# Altium PCB PCB.PcbDoc
Units mm, origin at the board's own origin, x right, y up, seen from the top; angles counter-clockwise.
Board outline 50 x 36 mm, 2 copper layers (Top Layer, Bottom Layer), stack 1.57 mm thick; 23 components, 10 nets, 42 pads, 153 vias.
Unrouted connection lines stored in the file: 2.
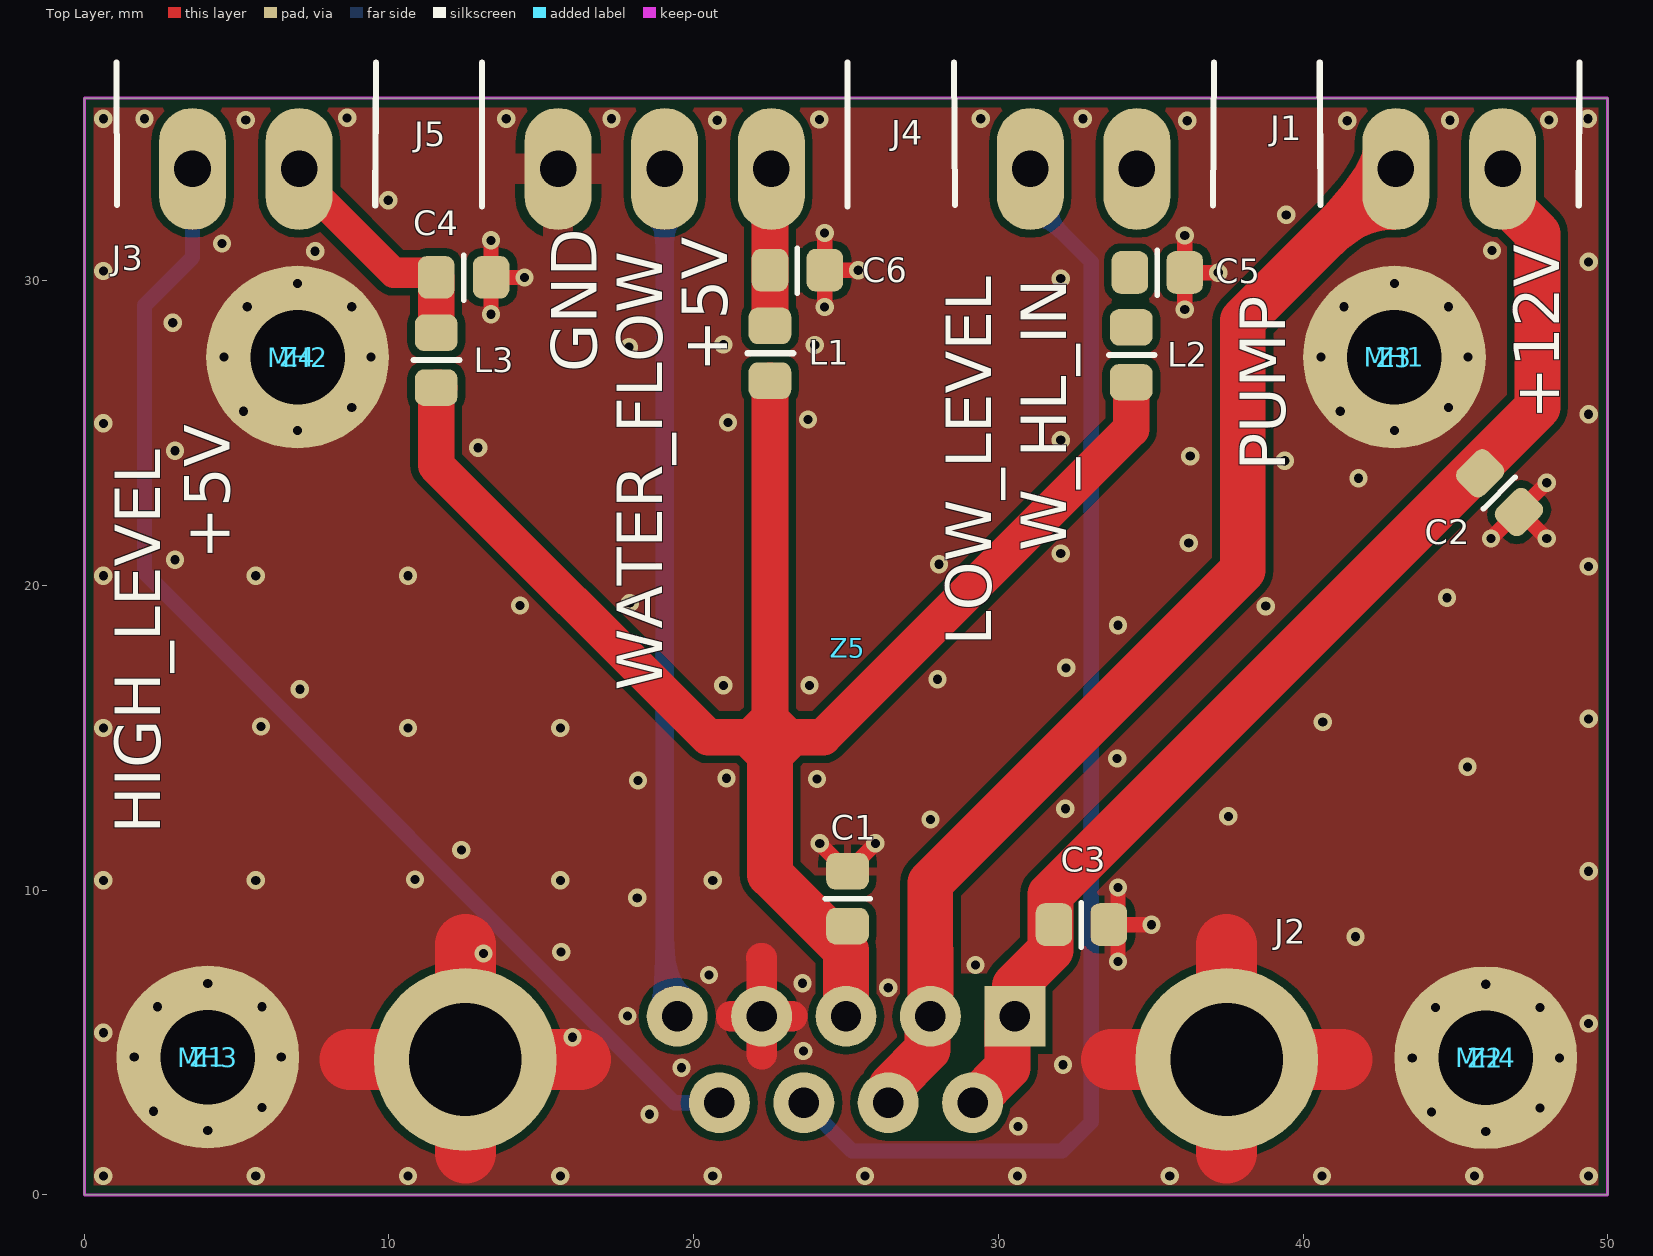
[diagram p0: Top Layer view]
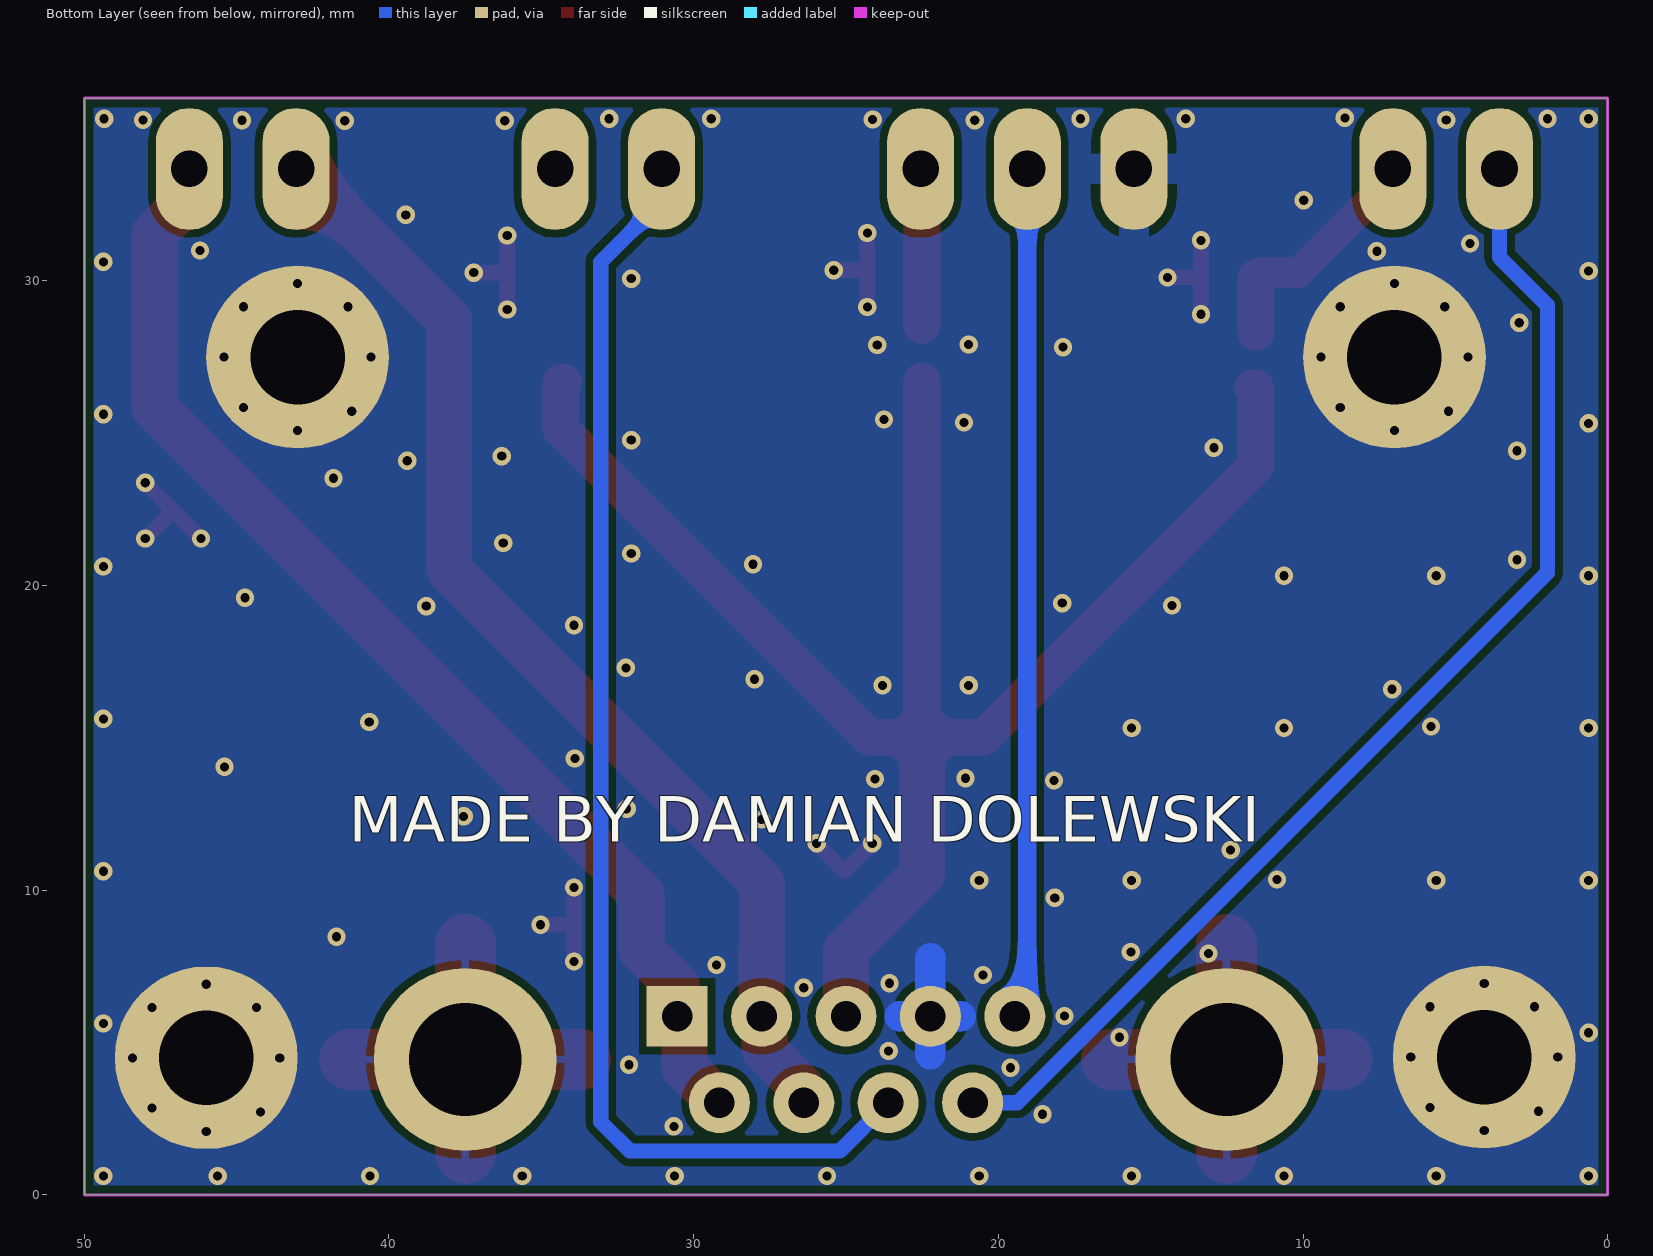
[diagram p1: Bottom Layer view, seen from below]

## Layer stack, top to bottom
Top Solder: solder mask 0.01, Solder Resist, Dk 3.5
Top Layer: signal copper 0.035
Dielectric 1: dielectric 1.5, FR-4, Dk 4.8
Bottom Layer: signal copper 0.035
Bottom Solder: solder mask 0.01, Solder Resist, Dk 3.5

## Board outline
0,0 50,0 50,36 0,36

## Design rules (kind name [scope] priority, off if disabled: settings)
Clearance [All] p1: gap=0.254 ignorepadtopadclearanceinfootprint=FALSE except(0: Arc-Hole Track-Hole SMDPad-Hole THPad-Hole Via-Hole Fill-Hole Poly-Hole Region-Hole Text-Hole)
ComponentClearance [InComponent('Radiator1')] p1: gap=0 collisioncheckmode=3 verticalgap=0 showdistances=FALSE
Height [All] p1: minheight=0 maxheight=40 prefheight=12.7
HoleSize [All] p1: absolutevalues=TRUE maxlimit=5 minlimit=0.025 maxpercent=80.000 minpercent=20.000
PolygonConnect PolygonConnect_3pin [HasFootprint('284512-3')] p1: connectstyle=Relief reliefconductorwidth=1 reliefentries=4 polygonreliefangle="90 Angle" airgapwidth=0.3
PolygonConnect PolygonConnect_MH [HasFootprint('MH_M3')] p2: connectstyle=Direct reliefconductorwidth=0.254 reliefentries=4 polygonreliefangle="90 Angle" airgapwidth=0.254
PolygonConnect PolygonConnect_Via [IsVia] p3: connectstyle=Direct reliefconductorwidth=0.254 reliefentries=4 polygonreliefangle="90 Angle" airgapwidth=0.254
PolygonConnect [All] p4: connectstyle=Relief reliefconductorwidth=0.254 reliefentries=4 polygonreliefangle="90 Angle" airgapwidth=0.254
RoomDefinition boxer_spliter [InComponentClass('boxer_spliter')] p1: confinementstyle=ConfineIn formatcopy=TRUE lockcomponents=FALSE outline -51.649,-37.525 308.534,-37.525 308.534,222.952 -51.649,222.952
RoutingVias [All] p1: holewidth=0.711 width=1.27 viastyle="Through Hole" minholewidth=0.711 minwidth=1.27 maxholewidth=0.711 maxwidth=1.27
SilkToSilkClearance [All] p1: silktosilkclearance=0.1
SilkToSolderMaskClearance [IsPad] p1: minsilkscreentomaskgap=0.2 clearancetoexposedcopper=TRUE
SolderMaskExpansion [All] p1: expansion=0.102
Width [All] p1: maxlimit=10 minlimit=0.3 preferedwidth=0.5 minimp=50.000000 maximp=50.000000 favimp=50.000000
25 further rules are at their usual default settings.

## Components (designator, comment, footprint, x,y, rotation, side; value= is the part's Value field where it differs from the comment)
C1 "Capacitor" C_0805 25.05,9.725 r90 top value=100n
C2 "Capacitor" C_0805 46.45,23.05 r315 top value=100n
C3 "Capacitor" C_0805 32.726,8.875 r0 top value=100n
C4 "Capacitor" C_0805 12.45,30.119 r0 top value=100n
C5 "Capacitor" C_0805 35.218,30.277 r0 top value=100n
C6 "Capacitor" C_0805 23.405,30.352 r0 top value=100n
J1 "284512-2" 284512-2 44.8,33.675 r0 top
J2 "DS1037-09FNAKT74" DB9 25,4.445 r180 top
J3 "284512-2" 284512-2 5.3,33.675 r0 top
J4 "284512-2" 284512-2 32.8,33.675 r0 top
J5 "284512-3" 284512-3 19.05,33.675 r0 top
L1 "742792031" L_0805 22.505,27.625 r270 top value=300@100M
L2 "742792031" L_0805 34.362,27.575 r270 top value=300@100M
L3 "742792031" L_0805 11.55,27.4 r270 top value=300@100M
MH1 "Mounting hole" MH_M3 43,27.5 r0 top
MH2 "Mounting hole" MH_M3 7,27.5 r0 top
MH3 "Mounting hole" MH_M3 4.05,4.525 r0 top
MH4 "Mounting hole" MH_M3 46,4.5 r0 top
Z1 "Hexagonal M3 5mm spacer" SPACER_M3_5mm 4.05,4.525 r0 top
Z2 "Hexagonal M3 5mm spacer" SPACER_M3_5mm 46,4.5 r0 top
Z3 "Hexagonal M3 5mm spacer" SPACER_M3_5mm 43,27.5 r0 top
Z4 "Hexagonal M3 5mm spacer" SPACER_M3_5mm 7,27.5 r0 top
Z5 "Supertronic PP94E" PP94E 25.05,17.95 r180 top locked

## Footprints (in the part's own frame and the unit in brackets; to place one, negate y for a bottom-side part, rotate by r counter-clockwise, add the part's x,y. Pads: shape width x height; smd on the part's side, far side on the other; paste and mask are expansions set on the pad)
284512-2 [mm] "Terminal Block 3.5mm 2-pin ,11A, 300V"
  oval 2.2x4 hole 1.2: 1(-1.75,0) 2(1.75,0)
  silkscreen extent -4.25,-1.2 4.28,3.5, body extent -4.5,-1.2 4.5,8, height 7.25
284512-3 [mm] "Terminal Block 3.5mm 3-pin ,11A, 300V"
  oval 2.2x4 hole 1.2: 1(-3.5,0) 2(0,0) 3(3.5,0)
  silkscreen extent -6,-1.22 6,3.5, body extent -6.25,-1.2 6.25,8, height 7.25
C_0805 [mm] "Chip Capacitor, Body 2.0x1.3mm, IPC High Density"
  rrect50% 1.2x1.4 smd: 1(-0.9,0) 2(0.9,0)
  silkscreen extent 0,-0.75 0,0.72, body extent -1.01,-0.62 0.99,0.63, height 0.8
DB9 [mm]
  rect 2x2 hole 1: 1(-5.54,-1.42)
  round 2 hole 1: 2(-2.77,-1.42) 3(0,-1.42) 4(2.77,-1.42) 5(5.54,-1.42) 6(-4.155,1.42) 7(-1.385,1.42) 8(1.385,1.42) 9(4.155,1.42)
  round 6 hole 3.7: 10(-12.495,0) 11(12.495,0)
  body extent -15.19,-2.18 15.31,14.52, height 12.45
L_0805 [mm] "Chip Inductor Body 2.0x1.2mm, IPC Medium Density"
  rrect50% 1.2x1.4 smd: 1(-0.9,0) 2(0.9,0)
  silkscreen extent 0,-0.74 0,0.76, body extent -1.01,-0.63 0.99,0.57, height 0.95
MH_M3 [mm] "M3 3mm hole"
  round 6 hole 3.1: MH(0,0)
PP94E [mm]
  body extent -42.75,-24.15 42.75,24.15, height 17.4
SPACER_M3_5mm [mm]
  body extent -2.89,-2.5 2.89,2.5, height 6.4

## Part data
J1 J3 J4: library part "Header 2", "Header, 2-Pin"
J2: library part DB9, "Receptacle Assembly, 9 Position, Right Angle"
J5: library part "Header 3", "Header, 3-Pin"
L1 L2 L3: library part FB, "Ferrite Bead"
MH1 MH2 MH3 MH4: "Mounting hole 2.3mm"
Z1 Z2 Z3 Z4: library part SPACER_M3_5mm
Z5: library part PP94E

## Via types
v1: diameter 0.6, hole 0.3, Top Layer to Bottom Layer, tented both sides, 153 vias

## Nets (pads, with @x,y where several pads share a name; then routed paths per layer and width w, separated by ;. In a path a pad name is that pad's centre, name@x,y a point inside that pad or via, vN(x,y) a via of type N, cw(c..) or ccw(c..) an arc to the next point about the centre after c; other vN are vias at no path point)
+5V: C1.1 J2.3 L1.2 L2.2 L3.2 | length 57
  Top Layer w1.2: L3.2@11.65,26.5 L3.2 11.55,23.95 20.475,15.025 22.45,15.025 ; L1.2 22.505,15.08 ; L2.2@34.262,26.675 L2.2 34.362,25.137 24.25,15.025 22.505,15.025 ; 22.45,15.025 22.505,15.025 ; 22.45,15.025 22.505,15.08 ; 22.505,15.025 22.505,15.08
  Top Layer w1.5: 22.505,15.025 22.505,10.52 25,8.025 J2.3
+5V_HL: C4.1 J3.2 L3.1 | length 8.2
  Top Layer w1: J3.2 7.05,33.1 7.604,32.545 7.88,32.545 10.155,30.27 11.45,30.27 11.55,30.17 C4.1
  Top Layer w1.2: L3.1 11.55,30.019 C4.1
+5V_LL: C5.1 J4.2 L2.1
+5V_WF: C6.1 J5.3 L1.1 | length 5.2
  Top Layer w1.2: L1.1 C6.1 22.505,33.631 J5.3
+12V: C2.1 C3.1 J1.2 J2.1 J2.6 | length 38.8
  Top Layer w1.5: J2.6 30.3,4.17 30.3,5.625 J2.1 30.54,6.865 31.715,8.04 31.715,9.865 47.7,25.85 47.7,31.546 46.55,32.697 J1.2
GND: C1.2 C2.2 C3.2 C4.2 C5.2 C6.2 J2.4 J2.10 J2.11 J5.1 MH1.MH MH2.MH MH3.MH MH4.MH | length 59.8
  Top Layer w0.5: v1(13.35,28.907) C4.2 ; v1(13.35,31.331) C4.2 ; v1(14.45,30.114) 13.355,30.114 C4.2 ; v1(24.136,11.539) C1.2 v1(25.964,11.539) ; v1(24.3,29.145) C6.2@24.3,30.357 ; v1(24.3,31.57) C6.2@24.3,30.357 ; v1(25.4,30.352) C6.2 C6.2@24.3,30.357 ; v1(33.925,7.663) C3.2@33.925,8.875 ; v1(33.925,10.087) C3.2@33.925,8.875 ; v1(35.025,8.87) 33.93,8.87 C3.2@33.925,8.875 ; v1(36.118,29.065) C5.2 ; v1(36.118,31.489) C5.2 ; v1(37.218,30.272) 36.123,30.272 C5.2 ; v1(46.173,21.548) C2.2@47.086,22.461 ; C2.2 C2.2@47.086,22.461 ; v1(48,21.548) C2.2@47.086,22.461 ; v1(48,23.375) C2.2@47.086,22.461
  Top Layer w1: 21.225,5.865 J2.4 ; 22.225,7.775 22.23,7.77 J2.4 ; 22.23,4.617 J2.4 ; 23.235,5.865 J2.4
  Top Layer w2: 8.725,4.445 J2.11 ; 12.505,1.375 J2.11 ; 12.505,8.225 J2.11 ; 16.285,4.445 J2.11 ; 33.715,4.445 J2.10 ; 37.495,1.375 J2.10 ; 37.495,8.225 J2.10 ; 41.275,4.445 J2.10
  Bottom Layer w1: 21.225,5.865 J2.4 ; 22.225,7.775 22.23,7.77 J2.4 ; 22.23,4.617 J2.4 ; 23.235,5.865 J2.4
  other v1: 0.625,0.625 5.625,0.625 10.625,0.625 15.625,0.625 20.625,0.625 25.625,0.625 30.625,0.625 35.625,0.625 40.625,0.625 45.625,0.625 49.375,0.625 46,2.087 4.05,2.112 30.65,2.25 18.55,2.65 44.222,2.722 2.272,2.747 47.778,2.849 5.828,2.874 19.6,4.175 32.125,4.275 43.587,4.5 48.413,4.5 1.637,4.525 6.463,4.525 23.6,4.725 16.025,5.175 0.625,5.325 49.375,5.625 17.825,5.875 44.349,6.151 47.778,6.151 2.399,6.176 5.828,6.176 26.385,6.8 46,6.913 4.05,6.938 23.575,6.95 20.5,7.221 29.25,7.549 13.1,7.925 15.65,7.975 41.725,8.475 18.15,9.75 0.625,10.325 5.625,10.325 15.625,10.325 20.625,10.325 10.85,10.35 49.375,10.625 12.375,11.325 27.775,12.325 37.55,12.425 32.2,12.675 18.175,13.6 24.05,13.65 21.075,13.675 45.4,14.05 33.9,14.325 0.625,15.325 10.625,15.325 15.625,15.325 5.8,15.375 40.65,15.525 49.375,15.625 7.075,16.6 20.975,16.725 23.8,16.725 28,16.925 32.225,17.3 33.925,18.7 38.775,19.325 14.3,19.35 17.9,19.425 44.725,19.6 0.625,20.325 5.625,20.325 10.625,20.325 49.375,20.625 28.05,20.7 2.975,20.85 32.05,21.05 36.25,21.4 41.825,23.525 39.4,24.1 36.3,24.25 2.975,24.425 12.925,24.525 32.05,24.775 7,25.087 43,25.087 0.625,25.325 21.125,25.35 23.75,25.45 49.375,25.625 5.222,25.722 41.222,25.722 8.778,25.849 44.778,25.849 4.587,27.5 9.413,27.5 40.587,27.5 45.413,27.5 17.875,27.827 20.975,27.913 23.975,27.9 2.9,28.625 5.349,29.151 8.778,29.151 41.349,29.151 44.778,29.151 7,29.913 43,29.913 32.05,30.075 0.625,30.325 49.375,30.625 7.575,30.973 46.2,31 4.516,31.225 39.45,32.168 9.975,32.65 36.2,35.258 41.45,35.258 5.3,35.281 20.775,35.275 44.825,35.275 48.075,35.281 24.125,35.3 0.625,35.325 1.975,35.325 13.85,35.325 17.3,35.325 29.425,35.325 32.775,35.325 49.35,35.325 8.625,35.352
PUMP_OUT: J1.1 J2.2 J2.7 | length 37.8
  Top Layer w1.5: J2.7 26.481,3.121 26.481,3.567 27.674,4.761 27.674,5.769 J2.2 27.77,10.245 38.025,20.5 38.025,28.703 42.328,33.006 42.727,33.006 43.05,33.33 J1.1
W_HL_IN: J2.9 J3.1 | length 40
  Bottom Layer w0.5: J3.1 3.55,30.775 1.975,29.2 1.975,20.425 19.375,3.025 J2.9
W_LL_IN: J2.8 J4.1 | length 42.6
  Bottom Layer w0.5: J2.8 25.194,1.446 32.096,1.446 33.05,2.4 33.05,30.625 31.05,32.625 J4.1
WF_IN: J2.5 J5.2 | length 28
  Bottom Layer w0.6: J5.2 19.05,6.654 19.46,6.244 J2.5

## Polygon pours and split planes (outlines as drawn)
GND on Bottom Layer "BOTTOM_GND" (solid, remove dead copper, pour order 4): 0,36 50,36 50,0 0,0
no net on Bottom Layer "BOTTOM_GND" (solid, pour order 2): 102.05,10.402
GND on Top Layer "TOP_GND" (solid, remove dead copper, pour order 6): 0,36 50,36 50,0 0,0

## Keep-outs
Keep-Out Layer:
  the board outline again, w0.1

## Other copper
Top Layer:
  region net +5V: 23.562,14.488 22.499,13.426 21.413,14.512
  region net +5V: 21.425,15.425 22.488,16.488 23.573,15.402
  pour cut-out: 26.385,1.76 29.155,1.76 29.155,3.025 30.79,4.66 30.79,7.05 30.565,7.275 28.212,7.275 27.675,6.738 27.675,5.1

## Silkscreen, mask and mechanical layers (free items; w line width, h text height)
Top Overlay:
  text "GND" at 16.825,27 h1.5 r90
  text "+5V" at 21.1,27 h1.5 r90
  text "+12V" at 48.413,25.45 h1.5 r90
  text "PUMP" at 39.425,23.775 h1.5 r90
  text "W_HL_IN" at 32.226,21.125 h1.5 r90
  text "+5V" at 4.775,20.85 h1.5 r90
  text "LOW_LEVEL" at 29.775,18.025 h1.5 r90
  text "WATER_FLOW" at 18.975,16.55 h1.5 r90
  text "HIGH_LEVEL" at 2.5,11.85 h1.5 r90
Bottom Overlay:
  text "MADE BY DAMIAN DOLEWSKI" at 41.314,11.6 h1.5
Mechanical 1:
  lines w0.1: -17.7,41.175 0.8,41.175 ; 9.8,41.675 12.8,41.675 ; 25.3,41.675 28.3,41.675 ; 49.3,41.175 67.8,41.175